# Altium PCB Power_Supply.PcbDoc (part 1 of 2)
Units mm, origin at the board's own origin, x right, y up, seen from the top; angles counter-clockwise.
Board outline 100.2 x 49.53 mm, 2 copper layers (Top Layer, Bottom Layer); 41 components, 25 nets, 105 pads, 0 vias.
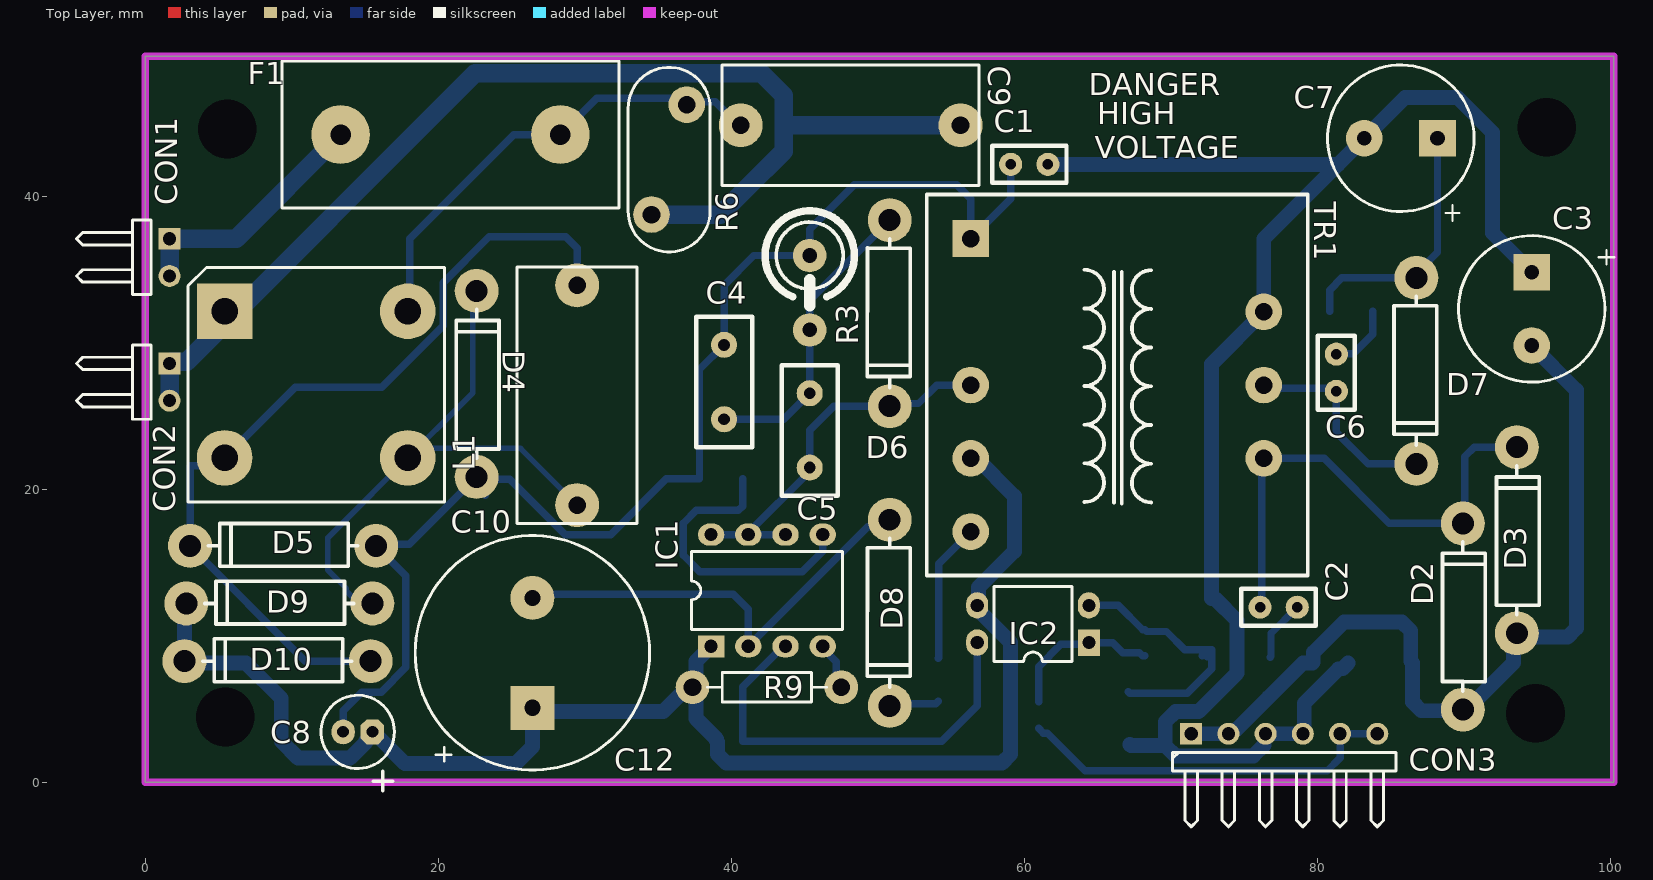
[diagram p0: Top Layer view]
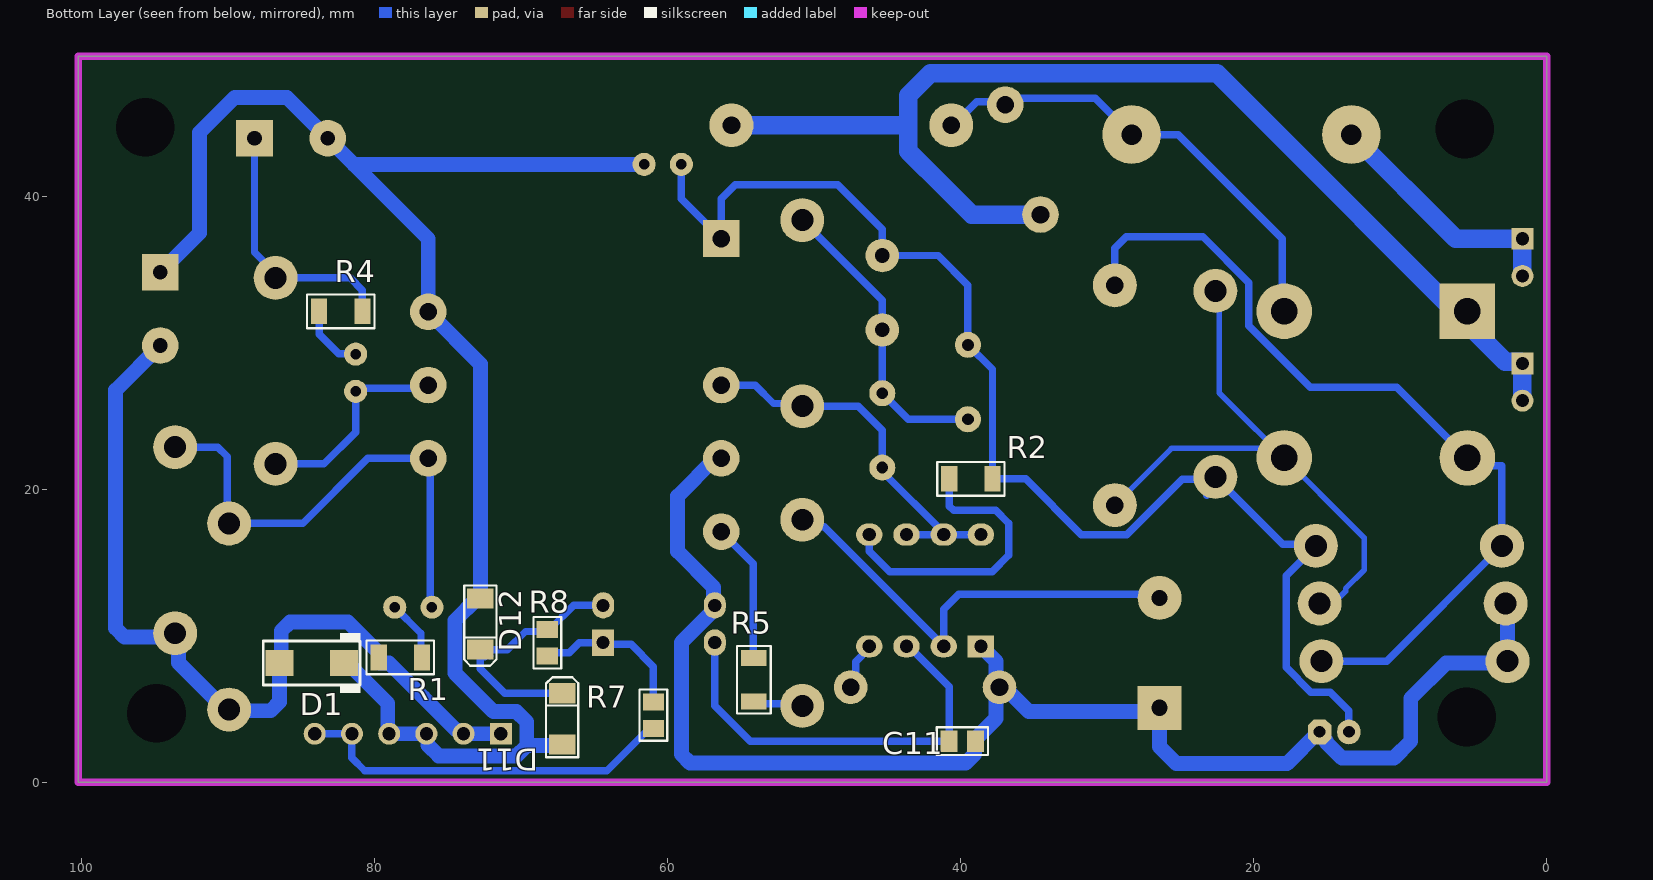
[diagram p1: Bottom Layer view, seen from below]
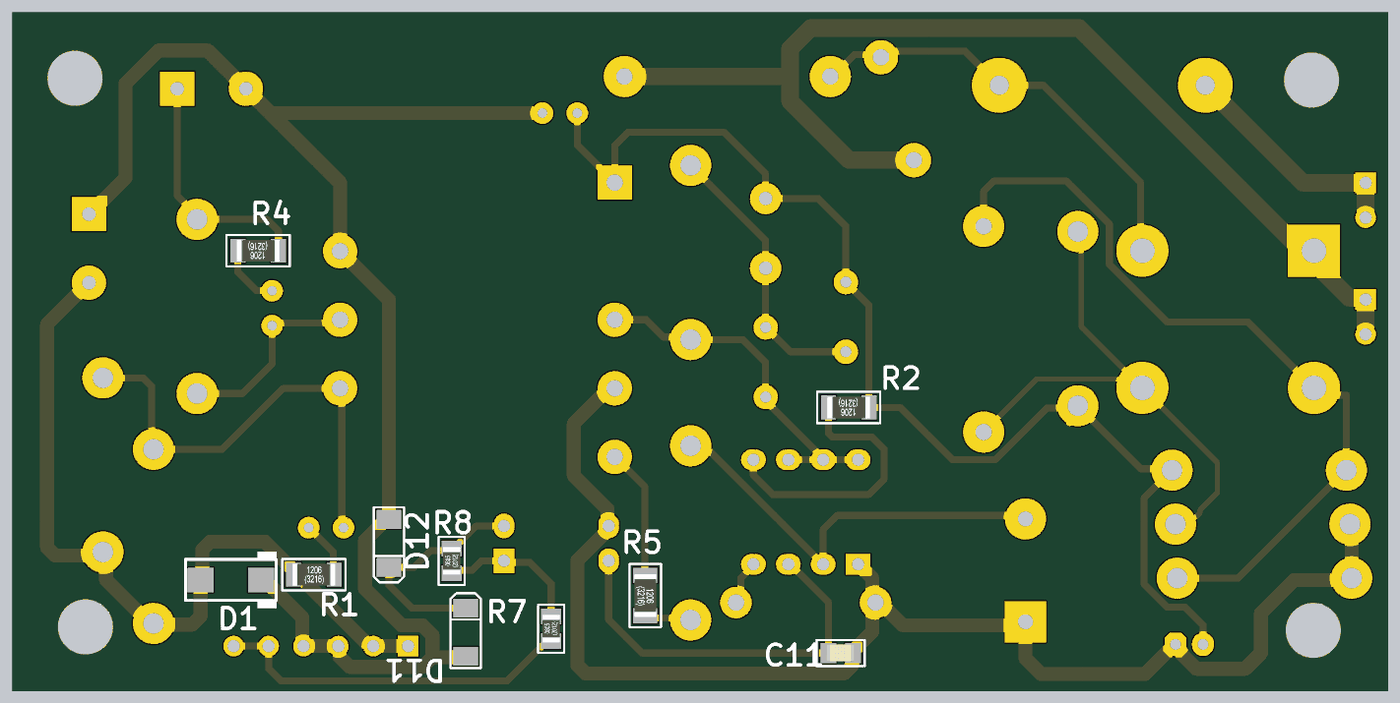
[diagram p2: 3D render of the assembled board from below, using the file's embedded part models]

## Layer stack, top to bottom
Top Solder: solder mask 0.0102, Solder Resist, Dk 3.5
Top Layer: signal copper 0.0356
Dielectric 1: dielectric 0.32, FR-4, Dk 4.8
Bottom Layer: signal copper 0.0356
Bottom Solder: solder mask 0.0102, Solder Resist, Dk 3.5

## Board outline
0,0 100.203,0 100.203,49.53 0,49.53

## Design rules (kind name [scope] priority, off if disabled: settings)
Clearance [All] p1: gap=0.254 ignorepadtopadclearanceinfootprint=FALSE
Height [All] p1: minheight=0 maxheight=30 prefheight=20
PolygonConnect [All] p1: connectstyle=Relief reliefconductorwidth=0.254 reliefentries=4 polygonreliefangle="90 Angle" airgapwidth=0.254
RoutingVias [All] p1: holewidth=0.711 width=1.27 viastyle="Through Hole" minholewidth=0.711 minwidth=1.27 maxholewidth=0.711 maxwidth=1.27
ShortCircuit [All] p1: allowed=TRUE
SolderMaskExpansion [All] p1: expansion=0.102 istentingtop=FALSE
Width [All] p1: maxlimit=2.54 minlimit=0.254 preferedwidth=0.254
28 further rules are at their usual default settings.

## Components (designator, comment, footprint, x,y, rotation, side; value= is the part's Value field where it differs from the comment)
C1 "22nF" 2.54X5.5MM 61.595,42.164 r180 top value=220pF
C2 "220pF" 2.54X5.5MM 78.613,11.938 r180 top
C3 "470uF" RAD5X10X16 94.615,34.798 r270 top
C4 "4.7nF" 5.08X12.5MM 39.497,29.845 r270 top
C5 "100pF" 5.08X12.5MM 45.339,26.543 r270 top
C6 "220pF" 2.54X5.5MM 81.28,29.21 r270 top
C7 "470uF" RAD5X10X16 88.185,43.942 r180 top
C8 "22uF" RAD2X5X11 15.494,3.429 r180 top
C9 "150nF" MKPX2-15MM 40.631,44.831 r0 top
C10 "150nF" MKPX2-15MM 29.464,18.909 r90 top
C11 "100nF" CAPC2012X14N(0805) 39.878,2.794 r180 bottom
C12 "22uF" RAD7.5X16X26 26.416,5.073 r90 top
CON1 "Header-1x2" HEADER-1X2H 1.651,37.084 r270 top value=1x2
CON2 "Header-1x2" HEADER-1X2H 1.651,28.575 r270 top value=1x2
CON3 "HEADER-1X6" HEADER-1X6H 71.374,3.302 r0 top value=1x6
D1 "SMAJ24A-TR" DO-214AC-NEVA 84.287,8.128 r0 bottom
D2 "1N4937" DO-41 89.916,4.953 r90 top
D3 "1N4937" DO-41 93.599,10.16 r90 top
D4 "1N4007" DO-41 22.606,20.828 r90 top
D5 "1N4007" DO-41 15.748,16.129 r180 top
D6 "1N4007" DO-41 50.8,38.354 r270 top
D7 "1N4937" DO-41 86.741,34.417 r270 top
D8 "1N4937" DO-41 50.8,17.907 r270 top
D9 "1N4007" DO-41 15.494,12.192 r180 top
D10 "1N4007" DO-41 15.367,8.255 r180 top
D11 "BZX84-B22" SOD-80C 67.183,4.318 r270 bottom value=BZV55-B22
D12 "BZV55-B22V" SOD-80C 72.771,10.795 r90 bottom value=BZV55-B22
F1 "FUSE" "707001-FUSE HOLDER" 28.321,44.196 r180 top value=-
IC1 "IC-SMPS" DIP-8 38.608,9.271 r0 top value=-
IC2 "PC817B" DIP-4 64.389,9.525 r90 top value=-
L1 "LINE FILTER" "Line Filter 2x33mH" 5.407,32.131 r270 top value=-
R1 "100R" RESC3216X84N(1206) 78.232,8.509 r180 bottom
R2 "56K" RESC3216X84N(1206) 39.292,20.701 r0 bottom value=100K
R3 "100K" "VERTICAL RES-AX0.7" 45.339,35.941 r270 top
R4 "100R" RESC3216X84N(1206) 82.296,32.131 r0 bottom
R5 "100R" RESC3216X84N(1206) 54.102,6.985 r270 bottom
R6 "320VAC" VARISTOR-320V-10mm 35.744,42.485 r270 top value=680
R7 "680R" RESC2013X70N(0805) 60.96,4.572 r90 bottom value=1K
R8 "1K" RESC2013X70N(0805) 68.199,9.514 r90 bottom value=6.8K
R9 "6.8K" AXIAL0.4 47.498,6.477 r180 top
TR1 "Transformer" TRAFO-24X25X18MM 56.327,37.098 r0 top

## Footprints (in the part's own frame and the unit in brackets; to place one, negate y for a bottom-side part, rotate by r counter-clockwise, add the part's x,y. Pads: shape width x height; smd on the part's side, far side on the other; paste and mask are expansions set on the pad)
2.54X5.5MM [mil] "Body 5X2.54mm, Pitch:2.54mm"
  round 62 hole 28: 1(0,0) 2(100,0)
  silkscreen extent -50,-50 150,50
5.08X12.5MM [mil] "body:8.9x3.81mm (W x L) Pitch:5.08mm"
  round 70 hole 32: 1(0,0) 2(200,0)
  silkscreen extent -75,-75 275,75
"707001-FUSE HOLDER" [mm] "Body:22.8X8.1 mm (W x L)"
  round 4 hole 1.4: 1(0,0) 2(15,0)
  silkscreen extent -4,-5 19,5
AXIAL0.4 [mm] "body:3.5 X 10 mm( D  x L ) Pitch:10.16 mm (400mil)"
  round 2.3 hole 1.2: 1(0,0) 2(10.16,0)
  silkscreen extent 1.02,-1.02 9.14,1.02
CAPC2012X14N(0805) [mm] "Chip Capacitor, 2-Leads, Body 2,00x1,25mm, IPC Medium Density"
  rect 1.15x1.45 smd: 1(-0.9,0) 2(0.9,0)
  silkscreen extent -1.75,-0.95 1.75,0.95, body extent -1.03,-0.62 0.97,0.63, height 1.38
DIP-4 [mm] "Body: 7.6 X 6.5 mm (L x W)  Pitch:2.54 mm"
  rect 1.8x1.5 hole 0.9: 1(0,0)
  oval 1.8x1.5 hole 0.9: 2(2.54,0) 3(2.54,7.62) 4(0,7.62)
  silkscreen extent -1.28,1.16 3.82,6.46
DIP-8 [mm] "8-Pin DIP Body: 5.3 X 10.3 mm (W x L)  pitch:2.54mm"
  rect 1.8x1.5 hole 0.9: 1(0,0)
  oval 1.8x1.5 hole 0.9: 2(2.54,0) 3(5.08,0) 4(7.62,0) 5(7.62,7.62) 6(5.08,7.62) 7(2.54,7.62) 8(0,7.62)
  silkscreen extent -1.34,1.16 8.96,6.46
DO-41 [mm] "body: 13 X3 mm (W x L) Pitch:12.7mm"
  round 3 hole 1.5: 1(0,0) 2(12.7,0)
  silkscreen extent 1.27,-1.53 11.43,1.4
DO-214AC-NEVA [mm] "Body;5.84X 3.04mm (WxL),Pitch 4.4mm"
  rect 1.9x1.8 smd: 1(2.2,0) 2(-2.2,0)
  silkscreen extent -3.35,-2.06 3.3,2.06
HEADER-1X2H [mm] "Connector; Header; 2 Position; Right Angle"
  rect 1.5x1.5 hole 0.9: 1(0,0)
  round 1.5 hole 0.9: 2(2.54,0)
  silkscreen extent -1.27,-6.35 3.81,-1.27
HEADER-1X6H [mm] "Connector; Header; 6 Position; Right Angle"
  rect 1.5x1.5 hole 0.9: 1(0,0)
  round 1.5 hole 0.9: 2(2.54,0) 3(5.08,0) 4(7.62,0) 5(10.16,0) 6(12.7,0)
  silkscreen extent -1.27,-6.35 13.97,-1.27
"Line Filter 2x33mH" [mm] "body:17.5x16x21 mm (W X L X H)"
  rect 3.8x3.8 hole 1.8: 1(0,0)
  round 3.8 hole 1.8: 2(10,0) 3(10,12.5) 4(0,12.5)
  silkscreen extent -3,-2.5 13,15
MKPX2-15MM [mm] "Metallized Polypropylene Film Capacitor;Body 15x12mm (P X H)"
  round 3 hole 1.2: 1(0,0) 2(15,0)
  silkscreen extent -1.27,-4.1 16.26,4.1
RAD2X5X11 [mm] "Capacitor, Electrolytic, Radial; Body 5 x 11 mm (Dia.xL typ); Pin Spacing 2 mm (typ)"
  oct 1.6x1.7 hole 0.8: 1(0,0)
  oval 1.6x1.7 hole 0.8: 2(2,0)
  silkscreen extent -1.5,-2.5 3.5,4.01
RAD5X10X16 [mm] "Capacitor, Electrolytic, Radial; Body 10 x 16 mm (Dia.xL typ); Pin Spacing 5 mm (typ)"
  rect 2.5x2.5 hole 1: 1(0,0)
  round 2.5 hole 1: 2(5,0)
  silkscreen extent -2.5,-5 7.5,5.64
RAD7.5X16X26 [mm] "Capacitor, Electrolytic, Radial; Body 16 x 26 mm (Dia.xL typ); Pin Spacing 7.5 mm (typ)"
  rect 3x3 hole 1.1: 1(0,0)
  round 3 hole 1.1: 2(7.5,0)
  silkscreen extent -4.25,-8 11.75,8
RESC2013X70N(0805) [mm] "Chip Resistor, 2-Leads, Body 2,00x1,25mm, IPC Medium Density"
  rect 1.15x1.45 smd: 1(-0.9,0) 2(0.9,0)
  silkscreen extent -1.75,-0.95 1.75,0.95, body extent -1,-0.62 1,0.63, height 0.48
RESC3216X84N(1206) [mm] "Chip Resistor, 2-Leads, Body 3,20x1,60mm, IPC Medium Density"
  rect 1.1x1.75 smd: 1(-1.475,0) 2(1.475,0)
  silkscreen extent -2.3,-1.15 2.3,1.15, body extent -1.55,-0.8 1.55,0.8, height 0.67
SOD-80C [mm] "body:3.5 X 1.45 mm (L x W)  Pitch:3.5mm"
  rect 1.37x1.8 smd: 1(-1.75,0) 2(1.75,0)
  silkscreen extent -2.84,-1.1 2.62,1.1
TRAFO-24X25X18MM [mm] "Body:24/25/18 mm (W x L x H) Pitch:4mm-15.2mm"
  rect 2.5x2.5 hole 1.2: 1(0,0)
  round 2.5 hole 1.2: 3(0,-10) 4(0,-15) 5(0,-20) 7(20,-15) 8(20,-10) 9(20,-5)
  silkscreen extent -3,-23 23,3
VARISTOR-320V-10mm [mm] "body:15.5 X 5.4 mm (W x L)   Pitch:7.5mm"
  round 2.5 hole 1.2: 1(-3.75,1.2) 2(3.75,-1.2)
  silkscreen extent -6.3,-2.8 6.3,2.8
"VERTICAL RES-AX0.7" [mil] "Dia:6 mm  Pitch:5mm"
  round 90 hole 39: 1(0,0) 2(200,0)
  silkscreen extent -120,-120 135,120

## Part data
C1: library part "CAP CER DISC 220PF", "KEMET 220pF Multilayer Ceramic Capacitor (MLCC) 500 V dc 10% X7R dielectric C SMT max op. temp. +125C", Capacitance=220pF, Case Code (Metric)=2012, Case Code (Imperial)=0805, Dielectric=X7R, Dielectric Material=Ceramic, Manufacturer=KEMET, Max Operating Temperature=125°C, Min Operating Temperature=-55°C, Package Quantity=1, Supplier Part Number 1=80-C0805C221KCR, Tolerance=10%, Voltage=500V, Case/Package=0805, Category="Ceramic Capacitors", Component=2, ComponentLink1Description=https://datasheet.ciiva.com/14606/70096142-14606492.pdf?src-supplier=Allied+Electronics, ComponentLink1URL=https://datasheet.ciiva.com/14606/70096142-14606492.pdf?src-supplier=Allied+Electronics, Depth=1.2mm, Dissipation Factor=2.5%, Height=1.25mm, Length=2mm, Manufacturer Part Number="CAP CER DISC 220PF", Mount="Surface Mount,PCB", Number of Pins=2, Packaging="Tape and Reel", Pricing 1="1=0,37000, 10=0,21600, 100=0,15700, 500=0,13900, 1000=0,11800, 2500=0,09500 (USD)", RoHS=Yes, Stock 1=17842, Supplier 1=Mouser, Termination=SMD/SMT, Thickness=0.055inch, Voltage Rating=500V, Voltage Rating (DC)=500V, Width=0.049inch
C2 C6: library part "CAP CER DISC 220PF", "KEMET 220pF Multilayer Ceramic Capacitor (MLCC) 500 V dc 10% X7R dielectric C SMT max op. temp. +125C", Case Code (Metric)=2012, Case Code (Imperial)=0805, Dielectric=X7R, Dielectric Material=Ceramic, Manufacturer=KEMET, Max Operating Temperature=125°C, Min Operating Temperature=-55°C, Package Quantity=1, Supplier Part Number 1=80-C0805C221KCR, Tolerance=10%, Voltage=500V, Capacitance=220pF, Case/Package=0805, Category="Ceramic Capacitors", Component=2, ComponentLink1Description=https://datasheet.ciiva.com/14606/70096142-14606492.pdf?src-supplier=Allied+Electronics, ComponentLink1URL=https://datasheet.ciiva.com/14606/70096142-14606492.pdf?src-supplier=Allied+Electronics, Depth=1.2mm, Dissipation Factor=2.5%, Height=1.25mm, Length=2mm, Manufacturer Part Number="CAP CER DISC 220PF", Mount="Surface Mount,PCB", Number of Pins=2, Packaging="Tape and Reel", Pricing 1="1=0,37000, 10=0,21600, 100=0,15700, 500=0,13900, 1000=0,11800, 2500=0,09500 (USD)", RoHS=Yes, Stock 1=17842, Supplier 1=Mouser, Termination=SMD/SMT, Thickness=0.055inch, Voltage Rating=500V, Voltage Rating (DC)=500V, Width=0.049inch
C3 C7: library part "CAP EL 470UF", "ALUMINUM ELECTROLYTIC CAPACITOR 100UF, 63V, 20%, RADIAL, FULL REEL; Product Range:VR Series; Capacitance:100 F; Capacitance Tolerance: 20%; Voltage Rating:63V; Diameter:10mm; Capacitor Terminals:Radial Leaded; Packaging:Tape & Reel ;RoHS Compliant: Yes", Capacitance=100uF, Case/Package=Radial, Leakage Current=189uA, Manufacturer=Nichicon, Max Operating Temperature=85°C, Min Operating Temperature=-40°C, Package Quantity=500, Ripple Current=300mA, Supplier Part Number 1=UVR1J101MPD1TD, Tolerance=20%, Voltage=63V, Category="Aluminum Electrolytic Capacitors", Component=18, ComponentLink1Description=https://datasheet.ciiva.com/11685/e-vr-11685845.pdf?src-supplier=Avnet, ComponentLink1URL=https://datasheet.ciiva.com/11685/e-vr-11685845.pdf?src-supplier=Avnet, ComponentLink2Description=https://datasheet.ciiva.com/103/e-vr-103352.pdf?src-supplier=Digi-Key, ComponentLink2URL=https://datasheet.ciiva.com/103/e-vr-103352.pdf?src-supplier=Digi-Key, ComponentLink3Description=https://datasheet.ciiva.com/14603/70187464-14603353.pdf?src-supplier=Allied+Electronics, ComponentLink3URL=https://datasheet.ciiva.com/14603/70187464-14603353.pdf?src-supplier=Allied+Electronics, ComponentLink4Description=https://datasheet.ciiva.com/16392/e-vr-16392921.pdf?src-supplier=Future+Electronics, ComponentLink4URL=https://datasheet.ciiva.com/16392/e-vr-16392921.pdf?src-supplier=Future+Electronics, ComponentLink5Description=https://datasheet.ciiva.com/46381/1758668-46381770.pdf?src-supplier=Element14, ComponentLink5URL=https://datasheet.ciiva.com/46381/1758668-46381770.pdf?src-supplier=Element14, ComponentLink6Description=https://datasheet.ciiva.com/17354/e-vr-17354940.pdf?src-supplier=Avnet+Europe, ComponentLink6URL=https://datasheet.ciiva.com/17354/e-vr-17354940.pdf?src-supplier=Avnet+Europe, ComponentLink7Description=https://datasheet.ciiva.com/7907/e-vr-7907502.pdf?src-supplier=Element14, ComponentLink7URL=https://datasheet.ciiva.com/7907/e-vr-7907502.pdf?src-supplier=Element14, Diameter=10mm, Dissipation Factor=0.1%, Height=12.5mm, Height - Seated (Max)=0.492inch, Lead Diameter=0.6mm, Lead Pitch=5mm, Length=12.5mm, Life (Hours)=2000Hour, Manufacturer Part Number="CAP EL 470UF", Mount="Through Hole,PCB", Number of Pins=2, Packaging="Tape and Reel", Pricing 1="1=0,21830, 10=0,14660, 25=0,05930, 100=0,05410, 2000=0,07080, 6000=0,06440 (USD)", Radiation Hardening=No, REACH SVHC="No SVHC", RoHS=Yes, Stock 1=105, Supplier 1=Arrow, Termination=Radial, Voltage Rating=63V, Voltage Rating (DC)=63V
C4: library part "CAP CER DISC 4.7NF", "KEMET - C0805C472KARACAUTO - Keramikvielschichtkondensator, SMD, 4700 pF, 250 V, 0805 [Metrisch 2012], ± 10%, X7R", Case Code (Metric)=2012, Case Code (Imperial)=0805, Dielectric=X7R, Manufacturer=KEMET, Max Operating Temperature=125°C, Min Operating Temperature=-55°C, Package Quantity=4000, Supplier Part Number 1=80-C0805C472KARAUTO, Tolerance=10%, Voltage Rating=250V, Capacitance=4.7nF, Case/Package=0805, Category=Capacitors, Component=4, ComponentLink1Description=http://www.mouser.com/ds/2/212/KEM_C1023_X7R_AUTO_SMD-1093309.pdf?src-supplier=Mouser, ComponentLink1URL=http://www.mouser.com/ds/2/212/KEM_C1023_X7R_AUTO_SMD-1093309.pdf?src-supplier=Mouser, ComponentLink2Description=http://www.farnell.com/datasheets/2747493.pdf?src-supplier=Farnell, ComponentLink2URL=http://www.farnell.com/datasheets/2747493.pdf?src-supplier=Farnell, ComponentLink3Description=http://www.farnell.com/datasheets/2747493.pdf?src-supplier=Element14, ComponentLink3URL=http://www.farnell.com/datasheets/2747493.pdf?src-supplier=Element14, ComponentLink4Description=https://api.kemet.com/component-edge/download/specsheet/C0805C472KARACAUTO.pdf?src-supplier=Digi-Key, ComponentLink4URL=https://api.kemet.com/component-edge/download/specsheet/C0805C472KARACAUTO.pdf?src-supplier=Digi-Key, ComponentLink5Description=http://www.farnell.com/datasheets/2747493.pdf?src-supplier=Newark, ComponentLink5URL=http://www.farnell.com/datasheets/2747493.pdf?src-supplier=Newark, Height=1.25mm, Length=2mm, Manufacturer Part Number="CAP CER DISC 4.7NF", Packaging="Tape and Reel", Pricing 1="1=0,28000, 10=0,11500, 100=0,09700, 500=0,06700, 1000=0,05900, 4000=0,04600 (USD)", RoHS=Yes, Stock 1=3353, Supplier 1=Mouser, Termination=SMD/SMT, Voltage Rating (DC)=250V, Width=1.2mm
C5: library part "CAP CER DISC 100PF", "CAP CER 100PF 1KV X7R 0805", Case Code (Metric)=2012, Case Code (Imperial)=0805, Dielectric=X7R, Dielectric Material=Ceramic, Manufacturer=KEMET, Max Operating Temperature=125°C, Min Operating Temperature=-55°C, Package Quantity=1, Supplier Part Number 1=80-C0805C101KDRACTU, Tolerance=10%, Voltage Rating=1kV, Voltage Rating (DC)=1.5kV, Capacitance=100pF, Case/Package=0805, Category="Ceramic Capacitors", Component=5, ComponentLink1Description=http://www.farnell.com/datasheets/2315402.pdf?src-supplier=Farnell, ComponentLink1URL=http://www.farnell.com/datasheets/2315402.pdf?src-supplier=Farnell, ComponentLink2Description=http://components.arrow.com/part/dataview/0323_00070989?src-supplier=Arrow+Europe, ComponentLink2URL=http://components.arrow.com/part/dataview/0323_00070989?src-supplier=Arrow+Europe, ComponentLink3Description=http://www.mouser.com/ds/2/212/KEM_C1010_X7R_HV_SMD-1102742.pdf?src-supplier=Mouser, ComponentLink3URL=http://www.mouser.com/ds/2/212/KEM_C1010_X7R_HV_SMD-1102742.pdf?src-supplier=Mouser, ComponentLink4Description=https://search.kemet.com/component-edge/download/datasheet/C0805C101KDRACTU.pdf?src-supplier=Digi-Key, ComponentLink4URL=https://search.kemet.com/component-edge/download/datasheet/C0805C101KDRACTU.pdf?src-supplier=Digi-Key, ComponentLink5Description=https://api.kemet.com/component-edge/download/datasheet/C0805C101KDRACTU.pdf?src-supplier=Digi-Key, ComponentLink5URL=https://api.kemet.com/component-edge/download/datasheet/C0805C101KDRACTU.pdf?src-supplier=Digi-Key, Depth=1.25mm, Height=1.25mm, Length=2mm, Manufacturer Part Number="CAP CER DISC 100PF", Mount="Surface Mount", Packaging="Tape and Reel", Pricing 1="1=0,52000, 10=0,31300, 100=0,18900, 500=0,16100, 1000=0,13900, 2500=0,10000 (USD)", Radiation Hardening=No, RoHS=Yes, Stock 1=2330, Supplier 1=Mouser, Termination=SMD/SMT, Thickness=0.055inch, Width=0.049inch
C8: library part "CAP EL 22UF 35VDC", "CAP, ALU ELEC, 22UF, 35V, SMD", Case/Package=Radial, Dielectric Material=Aluminium, Leakage Current=3uA, Manufacturer=Panasonic, Max Operating Temperature=85°C, Min Operating Temperature=-40°C, Package Quantity=1, Ripple Current=60mA, Supplier Part Number 1=667-EEE-1VA220SP, Tolerance=20%, Voltage=35V, Capacitance=22uF, Category="Aluminum Electrolytic Capacitors", Component=9, ComponentLink1Description=https://datasheet.ciiva.com/11778/0900766b8078636e-11778914.pdf?src-supplier=RSComponents, ComponentLink1URL=https://datasheet.ciiva.com/11778/0900766b8078636e-11778914.pdf?src-supplier=RSComponents, ComponentLink2Description=https://datasheet.ciiva.com/15166/getdatasheetpartid-135375-15166031.pdf?src-supplier=Verical, ComponentLink2URL=https://datasheet.ciiva.com/15166/getdatasheetpartid-135375-15166031.pdf?src-supplier=Verical, ComponentLink3Description=https://datasheet.ciiva.com/6085/aba0000ce2-6085109.pdf?src-supplier=Farnell, ComponentLink3URL=https://datasheet.ciiva.com/6085/aba0000ce2-6085109.pdf?src-supplier=Farnell, ComponentLink4Description=https://datasheet.ciiva.com/46376/aba0000ce2-46376415.pdf?src-supplier=Element14, ComponentLink4URL=https://datasheet.ciiva.com/46376/aba0000ce2-46376415.pdf?src-supplier=Element14, Contact Plating=Tin, Diameter=6.3mm, Height=5.4mm, Height - Seated (Max)=0.213inch, Lead Free="Lead Free", Lead Length=2.6mm, Lead Pitch=1.8mm, Length=5.5mm, Life (Hours)=2000Hour, Manufacturer Part Number="CAP EL 22UF 35VDC", Mount="Surface Mount,PCB", Number of Pins=2, Packaging="Tape and Reel", Pricing 1="1=0,33300, 10=0,21600, 100=0,15200, 500=0,14000, 1=0,37000, 10=0,24000, 100=0,16900, 500=0,15500, 1000=0,15500, 2000=0,15500 (EUR)", Radiation Hardening=No, REACH SVHC="No SVHC", Ripple Current (AC)=60mA, RoHS=Yes, Stock 1=12077, Supplier 1=Mouser, Termination=SMD/SMT, Voltage Rating=35V, Voltage Rating (DC)=35V, Width=6.6mm
C9 C10: library part "CAP MKP 150NF 275VAC", "Cap Film 0.15uF 275VAC PP 20% (17.5 X 6 X 13mm) Radial 15mm 110C Bulk", Case/Package=Radial, Dielectric=PP, Manufacturer=Panasonic, Max Operating Temperature=110°C, Min Operating Temperature=-40°C, Package Quantity=100, Supplier Part Number 1=667-ECQ-UAAF154M, Tolerance=20%, Voltage=275V, Capacitance=150nF, Category="Film Capacitors", Component=7, ComponentLink1Description=https://datasheet.ciiva.com/11792/0900766b80fb6a81-11792240.pdf?src-supplier=RSComponents, ComponentLink1URL=https://datasheet.ciiva.com/11792/0900766b80fb6a81-11792240.pdf?src-supplier=RSComponents, ComponentLink2Description=https://datasheet.ciiva.com/46399/1382881-46399669.pdf?src-supplier=Element14, ComponentLink2URL=https://datasheet.ciiva.com/46399/1382881-46399669.pdf?src-supplier=Element14, ComponentLink3Description=https://datasheet.ciiva.com/17632/abd0000ce53-17632333.pdf?src-supplier=Avnet+Europe, ComponentLink3URL=https://datasheet.ciiva.com/17632/abd0000ce53-17632333.pdf?src-supplier=Avnet+Europe, ComponentLink4Description=https://datasheet.ciiva.com/30066/47abd0000ce53-30066232.pdf?src-supplier=Onlinecomponents.com, ComponentLink4URL=https://datasheet.ciiva.com/30066/47abd0000ce53-30066232.pdf?src-supplier=Onlinecomponents.com, Contact Plating=Tin, Depth=6mm, Dielectric Material=PP, Height=13mm, Height - Seated (Max)=0.531inch, Lead Diameter=0.6mm, Lead Pitch=15mm, Lead/Base Style=Straight, Length=17.5mm, Manufacturer Part Number="CAP MKP 150NF 275VAC", Mount="Through Hole", Number of Pins=2, Packaging=Bulk, Pricing 1="1=0,48000, 10=0,34000, 100=0,22400, 500=0,16600, 1000=0,14100, 2000=0,12400 (USD)", Radiation Hardening=No, REACH SVHC="No SVHC", RoHS=Yes, Stock 1=1407, Supplier 1=Mouser, Termination=Radial, Voltage Rating (AC)=275V, Width=0.236inch
C11: library part "CAP CER 100NF", "TDK - CGA3E2X7R1H104K080AA. - CERAMIC CAPACITOR, 0.1UF, 50V, X7R, 0603, FULL REEL", Case Code (Metric)=1608, Case Code (Imperial)=0603, Dielectric=X7R, Manufacturer=TDK, Max Operating Temperature=125°C, Min Operating Temperature=-55°C, Package Quantity=1, Ratings=AEC-Q200, Supplier Part Number 1=810-CGA3E2X7R1H104K, Tolerance=10%, Voltage=50V, Capacitance=100nF, Case/Package=0603, Category="Ceramic Capacitors", Component=8, ComponentLink1Description=https://datasheet.ciiva.com/24216/cga3e2x7r1h104k080aa-266291-24216208.pdf?src-supplier=Mouser, ComponentLink1URL=https://datasheet.ciiva.com/24216/cga3e2x7r1h104k080aa-266291-24216208.pdf?src-supplier=Mouser, ComponentLink2Description=https://datasheet.ciiva.com/15192/getdatasheetpartid-715867-15192412.pdf?src-supplier=Verical, ComponentLink2URL=https://datasheet.ciiva.com/15192/getdatasheetpartid-715867-15192412.pdf?src-supplier=Verical, ComponentLink3Description=https://datasheet.ciiva.com/16500/mlccspec-automotive-general-midvoltage-en-16500693.pdf?src-supplier=Future+Electronics, ComponentLink3URL=https://datasheet.ciiva.com/16500/mlccspec-automotive-general-midvoltage-en-16500693.pdf?src-supplier=Future+Electronics, ComponentLink4Description=https://datasheet.ciiva.com/22725/1735392-22725642.pdf?src-supplier=Element14, ComponentLink4URL=https://datasheet.ciiva.com/22725/1735392-22725642.pdf?src-supplier=Element14, ComponentLink5Description=https://datasheet.ciiva.com/23803/1936565-23803084.pdf?src-supplier=Newark, ComponentLink5URL=https://datasheet.ciiva.com/23803/1936565-23803084.pdf?src-supplier=Newark, ComponentLink6Description=https://datasheet.ciiva.com/46385/1735392-46385708.pdf?src-supplier=Element14, ComponentLink6URL=https://datasheet.ciiva.com/46385/1735392-46385708.pdf?src-supplier=Element14, Composition=Ceramic, Depth=0.8mm, Height=0.8mm, Lead Free="Lead Free", Length=1.6mm, Manufacturer Part Number="CAP CER 100NF", Mount="Surface Mount", Packaging="Tape and Reel", Pricing 1="1=0,11000, 10=0,07900, 100=0,03500, 500=0,02500, 1000=0,01900, 4000=0,01300 (USD)", Radiation Hardening=No, REACH SVHC="No SVHC", RoHS=Yes, Stock 1=5553529, Supplier 1=Mouser, Termination=SMD/SMT, Thickness=0.035inch, Voltage Rating=50V, Voltage Rating (DC)=50V, Weight=7.1E-05oz, Width=0.8mm
C12: library part "CAP EL 22UF 450VDC", "Aluminum Electrolytic Capacitors - Leaded 22uF 450VDC -10% to 30%", Case/Package=Axial, Dielectric Material=Aluminium, ESR (Equivalent Series Resistance)=2.4R, Leakage Current=63.4uA, Manufacturer=KEMET, Max Operating Temperature=125°C, Min Operating Temperature=-40°C, Package Quantity=150, Ripple Current=240mA, Supplier Part Number 1=80-PEG124YH2220QL1, Tolerance=30%, Voltage=450V, Capacitance=22uF, Category="Aluminum Electrolytic Capacitors", Component=6, ComponentLink1Description=https://www.distrelec.biz/Web/Downloads/at/_e/xwPEG124xxx_dat_e.pdf?mime=application%2Fpdf&src-supplier=Distrelec, ComponentLink1URL=https://www.distrelec.biz/Web/Downloads/at/_e/xwPEG124xxx_dat_e.pdf?mime=application%2Fpdf&src-supplier=Distrelec, ComponentLink2Description=http://components.arrow.com/part/dataview/0323_01891001?src-supplier=Arrow+Europe, ComponentLink2URL=http://components.arrow.com/part/dataview/0323_01891001?src-supplier=Arrow+Europe, ComponentLink3Description=http://www.alliedelec.com/m/d/cbb45dc6290b6e87b76194cff6cccb64.pdf?src-supplier=Allied+Electronics, ComponentLink3URL=http://www.alliedelec.com/m/d/cbb45dc6290b6e87b76194cff6cccb64.pdf?src-supplier=Allied+Electronics, ComponentLink4Description=http://www.mouser.com/ds/2/212/KEM_A4011_PEG124-1104316.pdf?src-supplier=Mouser, ComponentLink4URL=http://www.mouser.com/ds/2/212/KEM_A4011_PEG124-1104316.pdf?src-supplier=Mouser, ComponentLink5Description=http://uk.rs-online.com/webdocs/00ab/0900766b800abff0.pdf?src-supplier=RSComponents, ComponentLink5URL=http://uk.rs-online.com/webdocs/00ab/0900766b800abff0.pdf?src-supplier=RSComponents, ComponentLink6Description=http://capacitoredge.kemet.com/capedge2/DataSheet?pn=A142ML220Q450A&src-supplier=Avnet, ComponentLink6URL=http://capacitoredge.kemet.com/capedge2/DataSheet?pn=A142ML220Q450A&src-supplier=Avnet, ComponentLink7Description=http://capacitoredge.kemet.com/capedge2/DataSheet?pn=A142ML220Q450A&src-supplier=Avnet+Europe, ComponentLink7URL=http://capacitoredge.kemet.com/capedge2/DataSheet?pn=A142ML220Q450A&src-supplier=Avnet+Europe, Diameter=20mm, Lead Diameter=0.8mm, Lead Length=42mm, Length=29mm, Manufacturer Part Number="CAP EL 22UF 450VDC", Mount="Through Hole", Packaging=Bulk, Pricing 1="1=5,43000, 10=4,97000, 50=4,50000, 100=4,13000, 250=3,74000, 500=3,73000 (USD)", Radiation Hardening=No, RoHS=Yes, Stock 1=959, Supplier 1=Mouser, Termination=Axial, Voltage Rating=450V, Voltage Rating (DC)=450V
CON1 CON2: library part HEADER1X2, "Conn Unshrouded Header HDR 6 POS 2.54mm Solder ST Thru-Hole", Case Code (Imperial)=125°C, Color=Black, Current Rating1=07:06:00, Manufacturer=Samtec, Max Voltage Rating (AC)1=550V, Resistance=15.24mm, Supplier Part Number 1=200-TSW10607LS, Temperature Coefficient=2.54mm, Category="Headers and Wire Housings", Component=1, ComponentLink1Description=Gold, ComponentLink7Description="No SVHC", ComponentLink7URL=No, ComponentLink8Description=https://datasheet.ciiva.com/48561/htsw-th-48561118.pdf?src-supplier=Avnet, ComponentLink8URL="Lead Free", ComponentLink9Description=https://datasheet.ciiva.com/48560/htsw-th-48560639.pdf?src-supplier=Avnet, ComponentLink9URL=https://datasheet.ciiva.com/48561/htsw-th-48561118.pdf?src-supplier=Avnet, Composition=https://datasheet.ciiva.com/22677/82167-22677747.pdf?src-supplier=Element14, Connector Type="Male Pin", Contact Mating Length=0.23inch, Depth=Solder, Features=https://datasheet.ciiva.com/25618/0900766b81154476-25618441.pdf?src-supplier=RSComponents, Gender=Male, Height=550V, Housing Material=Polyester, Lead Length=Bronze, Length=Bulk, Manufacturer Part Number=HEADER1X2, Max Current Rating=07:06:00, Max Power Dissipation=https://datasheet.ciiva.com/23732/320951-23732070.pdf?src-supplier=Newark, Number of Contacts=6, Number of Positions=6, Number of Rows=1, Number of Terminations=https://datasheet.ciiva.com/23732/320951-23732070.pdf?src-supplier=Newark, Orientation=Vertical, Packaging=https://datasheet.ciiva.com/22677/82167-22677747.pdf?src-supplier=Element14, Pitch=2.54mm, Power Rating=https://datasheet.ciiva.com/25618/0900766b81154476-25618441.pdf?src-supplier=RSComponents, Pricing 1="1=0,56000, 10=0,41900, 100=0,36700, 500=0,35000, 1000=0,28800, 2500=0,25300 (USD)", RoHS=Yes, Stock 1=2038, Supplier 1=Mouser, Termination=https://datasheet.ciiva.com/16723/htsw-th-16723150.pdf?src-supplier=Avnet+Europe, Thickness=Black, Voltage Rating=https://datasheet.ciiva.com/16723/htsw-th-16723150.pdf?src-supplier=Avnet+Europe, Weight=-55°C, Width=1, Working Voltage=https://datasheet.ciiva.com/48560/htsw-th-48560639.pdf?src-supplier=Avnet
CON3: library part HEADER1X6, Manufacturer="Adam Equipment", Supplier Part Number 1=2057-ADT-AMP1251106S4BS165A1-ND, Component=2, Manufacturer Part Number=HEADER1X6, Pricing 1="1=0,48000, 10=0,45500, 100=0,34850, 500=0,30300, 1000=0,24998, 5000=0,21968, 10000=0,20453 (USD)", RoHS=No, Stock 1=844, Supplier 1=Digi-Key
D1: library part DIODE-SMAJ, "STMICROELECTRONICS - SMAJ24A-TR - DIODE, TVS, 24V, 400W, UNI, SMA, RL", Breakdown Voltage=26.7V, Case Code (Metric)=600pF, Case Code (Imperial)=150°C, Case/Package=SMA, Clamping Voltage1=50V, Manufacturer=STMicroelectronics, Max Breakdown Voltage=28.1V, Max Power Dissipation1=3.3W, Max Reverse Leakage Current=200nA, Max Surge Current1=1mA, Min Operating Temperature=24V, Package Quantity=2, Peak Pulse Current=46A, Peak Pulse Power=400W, Power Line Protection=No, Resistance=4.6mm, Supplier Part Number 1=511-SMAJ24A-TR, Tolerance=2.03mm, Category="TVS Diodes", Component=1, ComponentLink3Description=200nA, ComponentLink4URL=Unidirectional, ComponentLink7Description="No SVHC", ComponentLink7URL=No, ComponentLink8Description=https://datasheet.ciiva.com/46394/1724007-46394359.pdf?src-supplier=Element14, ComponentLink8URL="Lead Free", ComponentLink9Description=https://datasheet.ciiva.com/337/cd00001333-337721.pdf?src-supplier=Digi-Key, ComponentLink9URL=https://datasheet.ciiva.com/46394/1724007-46394359.pdf?src-supplier=Element14, Composition=https://datasheet.ciiva.com/15143/getdatasheetpartid-82957-15143307.pdf?src-supplier=Verical, Depth=SMD/SMT, Diameter=Zener, Direction=Unidirectional, Element Configuration=Single, Energy=https://datasheet.ciiva.com/337/cd00001333-337722.pdf?src-supplier=Digi-Key, ESD Protection=Yes, Features=https://datasheet.ciiva.com/7965/1724007-7965493.pdf?src-supplier=Element14, Height - Seated (Max)=https://datasheet.ciiva.com/337/cd00001333-337722.pdf?src-supplier=Digi-Key, Length="Tape and Reel", Manufacturer Part Number=DIODE-SMAJ, Max Power Dissipation=https://datasheet.ciiva.com/337/cd00001333-337723.pdf?src-supplier=Digi-Key, Max Voltage Rating (AC)=https://datasheet.ciiva.com/41443/001183973-da-01-en-transil-400w-24v-smaj24a-tr-do-214ac-stm-41443285.pdf?src-supplier=Conrad, Min Breakdown Voltage=26.7V, Mount="Surface Mount", Number of Elements=1, Number of Terminations=https://datasheet.ciiva.com/337/cd00001333-337723.pdf?src-supplier=Digi-Key, Number of Unidirectional Channels=1, Operating Supply Voltage=24V, Packaging=https://datasheet.ciiva.com/15143/getdatasheetpartid-82957-15143307.pdf?src-supplier=Verical, Power Dissipation=400W, Power Rating=https://datasheet.ciiva.com/7965/1724007-7965493.pdf?src-supplier=Element14, Pricing 1="1=0,45000, 10=0,30800, 100=0,14400, 1000=0,10200, 5000=0,09800, 10000=0,08600 (USD)", REACH SVHC=2.95mm, Reverse Breakdown Voltage=26.7V, Reverse Standoff Voltage=24V, RoHS=Yes, Stock 1=15133, Supplier 1=Mouser, Termination=https://datasheet.ciiva.com/16204/cd00001333-16204855.pdf?src-supplier=Future+Electronics, Test Current=1mA, Varistor Voltage=https://datasheet.ciiva.com/41443/001183973-da-01-en-transil-400w-24v-smaj24a-tr-do-214ac-stm-41443285.pdf?src-supplier=Conrad, Voltage Rating=https://datasheet.ciiva.com/16204/cd00001333-16204855.pdf?src-supplier=Future+Electronics, Weight=-55°C, Width=1, Working Voltage=https://datasheet.ciiva.com/337/cd00001333-337721.pdf?src-supplier=Digi-Key
D2 D3 D7 D8: library part 1N4937G, "DIODE GEN PURP 600V 1A DO41", Average Rectified Current=01:00:00, Case Code (Imperial)=150°C, Current Rating=0.01lb, Forward Voltage=1.2V, Manufacturer="ON Semiconductor", Max Forward Surge Current (Ifsm)=30A, Max Repetitive Reverse Voltage (Vrrm)=600V, Package Quantity=2, Peak Reverse Current=5uA, Resistance=0.204inch, Supplier Part Number 1=863-1N4937G, Tolerance=0.25inch, Category="Rectifier Diodes", Component=2, ComponentLink1Description=Tin,Matte, ComponentLink4URL=Standard, ComponentLink5Description=2.7mm, ComponentLink7Description="No SVHC", ComponentLink7URL=No, ComponentLink8URL="Lead Free", Composition=https://datasheet.ciiva.com/916/1n4933-d-916277.pdf?src-supplier=Digi-Key, Current Rating1=01:00:00, Element Configuration=Single, Features=https://datasheet.ciiva.com/18435/70099679-18435384.pdf?src-supplier=Allied+Electronics, Forward Current=01:00:00, Halogen Free="Halogen Free", Length=Bulk, Manufacturer Part Number=1N4937G, Max Power Dissipation=https://datasheet.ciiva.com/7962/168219-7962936.pdf?src-supplier=Element14, Max Reverse Voltage (DC)=600V, Max Surge Current1=30A, Min Operating Temperature=600V, Number of Terminations=https://datasheet.ciiva.com/7962/168219-7962936.pdf?src-supplier=Element14, Output Current=01:00:00, Packaging=https://datasheet.ciiva.com/916/1n4933-d-916277.pdf?src-supplier=Digi-Key, Peak Non-Repetitive Surge Current=30A, Power Rating=https://datasheet.ciiva.com/18435/70099679-18435384.pdf?src-supplier=Allied+Electronics, Pricing 1="1=0,21600, 10=0,14900, 100=0,06000, 1000=0,04100, 2000=0,03300, 10000=0,02800, 25000=0,02700, 50000=0,02400, 100000=0,02300, 1=0,24000, 10=0,16500, 100=0,06700, 1000=0,04600, 2000=0,03700, 10000=0,03100 (EUR)", REACH SVHC=0.25inch, Recovery Time=300ns, Reverse Recovery Time=300ns, Reverse Voltage=600V, RoHS=Yes, Stock 1=11176, Supplier 1=Mouser, Weight=-65°C, Width=1000
D4 D5 D6 D9 D10: "Diode 1KV 1A 2-Pin DO-41 T/R", Average Rectified Current=01:00:00, Case Code (Metric)=15pF, Case Code (Imperial)=175°C, Current Rating=0.245g, Forward Voltage=1.1V, Manufacturer="ON Semiconductor / Fairchild", Max Forward Surge Current (Ifsm)=30A, Max Repetitive Reverse Voltage (Vrrm)=1kV, Package Quantity=2, Peak Reverse Current=5uA, Power Dissipation=3W, Resistance=5.2mm, Category="Integrated Circuits (ICs)", Component=3, ComponentLink1Description=Tin,Matte, ComponentLink4URL=Standard, ComponentLink5Description=2.72mm, ComponentLink7Description="No SVHC", ComponentLink7URL=No, ComponentLink8URL="Lead Free", Composition=https://datasheet.ciiva.com/1239/1n4005-1239313.pdf?src-supplier=Newark, Current Rating1=01:00:00, Element Configuration=Single, Features=https://datasheet.ciiva.com/910/1n4001-910361.pdf?src-supplier=Digi-Key, Forward Current=01:00:00, Length="Tape and Reel", Manufacturer Part Number=1N4007, Max Power Dissipation=https://datasheet.ciiva.com/927/1n4001-d-927427.pdf?src-supplier=Digi-Key, Max Reverse Voltage (DC)=1kV, Max Surge Current1=30A, Min Operating Temperature=1kV, Mount="Through Hole", Number of Terminations=https://datasheet.ciiva.com/927/1n4001-d-927427.pdf?src-supplier=Digi-Key, Output Current=01:00:00, Packaging=https://datasheet.ciiva.com/1239/1n4005-1239313.pdf?src-supplier=Newark, Peak Non-Repetitive Surge Current=30A, Power Rating=https://datasheet.ciiva.com/910/1n4001-910361.pdf?src-supplier=Digi-Key, Pricing 1="5000=0,08040, 10000=0,07890, 25000=0,07770, 50000=0,07650, 1=0,04550, 10=0,04510, 25=0,04460, 100=0,04420, 250=0,04080, 1=0,06170, 10=0,06120, 50=0,06050, 100=0,05990 (USD)", REACH SVHC=2.72mm, Reverse Voltage=1kV, RoHS=Yes, Stock 1=205000, Supplier 1=Arrow, Supplier Part Number 1=1N4007, Termination=https://datasheet.ciiva.com/910/1n4001-910362.pdf?src-supplier=Digi-Key, Tolerance=5.2mm, Voltage Rating=https://datasheet.ciiva.com/910/1n4001-910362.pdf?src-supplier=Digi-Key, Weight=-65°C, Width=1000
D11 D12: library part BZV55-B22,135, "DIODE ZENER 22V 500MW LLDS", Case Code (Imperial)=200°C, Manufacturer="NXP Semiconductors", Max Power Dissipation1=500mW, Max Reverse Leakage Current=50nA, Package Quantity=2, Supplier Part Number 1=771-BZV55-B22135, Test Current=5mA, Voltage Tolerance1=2%, Zener Voltage=22V, Category="Zener Diodes", Component=5, ComponentLink1Description=Tin,Matte, ComponentLink7URL=No, Composition=https://datasheet.ciiva.com/10644/bzv55-ser-10644374.pdf?src-supplier=Avnet, Contact Plating=2%, Element Configuration=Single, ESD Protection=No, Length="Tape and Reel", Manufacturer Part Number=BZV55-B22,135, Max Power Dissipation=https://datasheet.ciiva.com/898/bzv55-ser-898844.pdf?src-supplier=Digi-Key, Mount="Surface Mount", Number of Terminations=https://datasheet.ciiva.com/898/bzv55-ser-898844.pdf?src-supplier=Digi-Key, Packaging=https://datasheet.ciiva.com/10644/bzv55-ser-10644374.pdf?src-supplier=Avnet, Power Dissipation=500mW, Pricing 1="1=0,35000, 10=0,22700, 100=0,12300, 500=0,09700, 1000=0,07500, 2500=0,05900 (USD)", RoHS=Yes, Stock 1=1992, Supplier 1=Mouser, Weight=-65°C, Width=10000, Impedance=55R
F1: "Fuse Miniature Slow Blow Acting 1A 250V Holder Cartridge 5 X 20mm Glass Bulk", Current Rating=1A, DC Cold Resistance=61.3mR, Manufacturer=Littelfuse, Max Operating Temperature=125°C, Min Operating Temperature=-55°C, Package Quantity=1000, Power Dissipation=1.6W, Supplier Part Number 1=0218001.MXP, Voltage Rating=250V, Approvals=UL,CSA,VDE,CE,CCC,PSE,SEMKO,K-Mark, Body Material=Glass, Category=Fuses, Component=9, ComponentLink1Description=https://datasheet.ciiva.com/14120/218-series-eng-tds-14120439.pdf?src-supplier=Distrelec, ComponentLink1URL=https://datasheet.ciiva.com/14120/218-series-eng-tds-14120439.pdf?src-supplier=Distrelec, Contact Material=Brass, Contact Plating=Nickel, Diameter=5mm, Fuse Current=1A, Fuse Type="Cartridge, Glass", Housing Material=Glass, Lead Free="Lead Free", Length=20mm, Manufacturer Part Number=FUSE, Mount="Holder,Through Hole", Number of Pins=2, Packaging=Bulk, Pricing 1="1=0,04300, 1=0,78450, 10=0,62510, 100=0,53560, 250=0,50360, 500=0,42480, 1000=0,38460, 2000=0,35700, 1=0,89950, 10=0,68940, 100=0,57840, 250=0,53970, 500=0,44710, 1000=0,40120, 2000=0,37000, 1=0,85510, 10=0,66910, 100=0,56760, 250=0,53180, 500=0,44470, 10", Radiation Hardening=No, REACH SVHC=Unknown, Resistance=61.3mR, RoHS=Yes, Stock 1=43889, Supplier 1=Arrow, Termination=Clip, Voltage Rating (AC)=250V, Voltage Rating (DC)=250V, Working Voltage=250V
IC1: library part "IC SMPS FSL106HR", "IC,NC7WZ132K8X,", High Level Output Current=-32mA, Low Level Output Current=32mA, Manufacturer="ON Semiconductor / Fairchild", Max Operating Temperature=85°C, Max Supply Voltage=5.5V, Min Operating Temperature=-40°C, Min Supply Voltage=1.65V, Package Quantity=3000, Quiescent Current=1uA, Supplier Part Number 1=512-NC7WZ132K8X, Category="Logic Gates", Component=12, ComponentLink1Description=https://datasheet.ciiva.com/4818/nc7wz132-97672-4818801.pdf?src-supplier=Mouser, ComponentLink1URL=https://datasheet.ciiva.com/4818/nc7wz132-97672-4818801.pdf?src-supplier=Mouser, ComponentLink2Description=https://datasheet.ciiva.com/8278/nc7wz132-8278945.pdf?src-supplier=Avnet, ComponentLink2URL=https://datasheet.ciiva.com/8278/nc7wz132-8278945.pdf?src-supplier=Avnet, ComponentLink3Description=https://datasheet.ciiva.com/15090/getdatasheetpartid-110777-15090731.pdf?src-supplier=Verical, ComponentLink3URL=https://datasheet.ciiva.com/15090/getdatasheetpartid-110777-15090731.pdf?src-supplier=Verical, ComponentLink4Description=https://datasheet.ciiva.com/34301/1027871-34301887.pdf?src-supplier=Jameco, ComponentLink4URL=https://datasheet.ciiva.com/34301/1027871-34301887.pdf?src-supplier=Jameco, ComponentLink5Description=https://datasheet.ciiva.com/26865/nc7wz132k8x-26865071.pdf?src-supplier=IIIC, ComponentLink5URL=https://datasheet.ciiva.com/26865/nc7wz132k8x-26865071.pdf?src-supplier=IIIC, ComponentLink6Description=https://datasheet.ciiva.com/1868/nc7wz132-1868154.pdf?src-supplier=Digi-Key, ComponentLink6URL=https://datasheet.ciiva.com/1868/nc7wz132-1868154.pdf?src-supplier=Digi-Key, ComponentLink7Description=https://datasheet.ciiva.com/1868/nc7wz132-1868155.pdf?src-supplier=Digi-Key, ComponentLink7URL=https://datasheet.ciiva.com/1868/nc7wz132-1868155.pdf?src-supplier=Digi-Key, ComponentLink8Description=https://datasheet.ciiva.com/1868/nc7wz132-1868156.pdf?src-supplier=Digi-Key, ComponentLink8URL=https://datasheet.ciiva.com/1868/nc7wz132-1868156.pdf?src-supplier=Digi-Key, Contact Plating=Tin,Matte, Height=0.7mm, Lead Free="Lead Free", Length=2.3mm, Logic Function=NAND, Manufacturer Part Number="IC SMPS FSL106HR", Mount="Surface Mount", Number of Circuits=2, Number of Elements=2, Number of Gates=2, Number of Outputs=1, Number of Pins=8, Number of Terminals=8, Number of Inputs=2, Output Current=32mA, Packaging="Tape and Reel", Pricing 1="1=0,46000, 10=0,33900, 100=0,18900, 1000=0,14200, 3000=0,12200, 9000=0,11400 (USD)", Propagation Delay=13ns, Radiation Hardening=No, REACH SVHC="No SVHC", RoHS=Yes, Schmitt Trigger Input=No, Stock 1=3369, Supplier 1=Mouser, Turn-On Delay Time=6.3ns, Weight=0.03g, Width=2mm
IC2: library part "IC OPTO PC817B", "Optocoupler DC-IN 1-CH Transistor DC-OUT 4-Pin Mini-Flat T/R", Case/Package=SOIC, Collector Emitter Saturation Voltage=200mV, Collector Emitter Voltage (VCEO)=80V, Current Transfer Ratio=400%, Forward Current=50mA, Forward Voltage=1.4V, Manufacturer="Broadcom Avago", Max Operating Temperature=100°C, Max Power Dissipation=170mW, Min Operating Temperature=-55°C, Package Quantity=1, Reverse Breakdown Voltage=6V, Supplier Part Number 1=630-HCPL-181-00CE, Isolation Voltage=3.75kV, Approvals=UL,CSA,VDE, Category=Optocouplers, Component=8, ComponentLink1Description=https://datasheet.ciiva.com/15118/getdatasheetpartid-142379-15118792.pdf?src-supplier=Verical, ComponentLink1URL=https://datasheet.ciiva.com/15118/getdatasheetpartid-142379-15118792.pdf?src-supplier=Verical, ComponentLink2Description=https://datasheet.ciiva.com/16441/hcpl-181-00ce-16441017.pdf?src-supplier=Future+Electronics, ComponentLink2URL=https://datasheet.ciiva.com/16441/hcpl-181-00ce-16441017.pdf?src-supplier=Future+Electronics, ComponentLink3Description=https://datasheet.ciiva.com/29301/140250-da-01-en-fototransistor-optokoppler-hcpl-181-00ce-29301534.pdf?src-supplier=Conrad, ComponentLink3URL=https://datasheet.ciiva.com/29301/140250-da-01-en-fototransistor-optokoppler-hcpl-181-00ce-29301534.pdf?src-supplier=Conrad, ComponentLink4Description=https://datasheet.ciiva.com/46433/317140-46433653.pdf?src-supplier=Element14, ComponentLink4URL=https://datasheet.ciiva.com/46433/317140-46433653.pdf?src-supplier=Element14, ComponentLink5Description=https://datasheet.ciiva.com/8065/317140-8065628.pdf?src-supplier=Element14, ComponentLink5URL=https://datasheet.ciiva.com/8065/317140-8065628.pdf?src-supplier=Element14, ComponentLink6Description=https://datasheet.ciiva.com/48429/hcpl-181-eng-tds-48429868.pdf?src-supplier=Distrelec, ComponentLink6URL=https://datasheet.ciiva.com/48429/hcpl-181-eng-tds-48429868.pdf?src-supplier=Distrelec, ComponentLink7Description=https://datasheet.ciiva.com/8065/317140-8065629.pdf?src-supplier=Element14, ComponentLink7URL=https://datasheet.ciiva.com/8065/317140-8065629.pdf?src-supplier=Element14, Fall Time=18000ns, Manufacturer Part Number="IC OPTO PC817B", Max Collector Current=50mA, Max Output Voltage=80V, Max Input Current=50mA, Mount="Surface Mount", Number of Channels=1, Number of Elements=1, Number of Pins=4, Output Current per Channel=50mA, Packaging="Tape and Reel", Power Dissipation=170mW, Pricing 1="1=0,55000, 10=0,35700, 100=0,23700, 1000=0,17600, 3000=0,17600, 9000=0,17600 (USD)", Radiation Hardening=No, REACH SVHC="No SVHC", Rise Time=18000ns, RoHS=Yes, Stock 1=12141, Supplier 1=Mouser
L1: "WURTH ELEKTRONIK - 744272392 - Filter, Netzfilter, Oberflächenmontage, 2X3900µH, WE-SL5, 9.6 kOhm, 520mA, 10mm x 8.7mm x 6.5mm", Case/Package=SMD/SMT, Current=520mA, DC Resistance (DCR)=540mR, Manufacturer="Wurth Electronics", Max Operating Temperature=125°C, Min Operating Temperature=-40°C, Package Quantity=1, Self Resonant Frequency=100kHz, Supplier Part Number 1=710-744272392, Tolerance=40%, Voltage Rating=80V, Inductance=3.9mH, Category="Common Mode Chokes", Component=3, ComponentLink1Description=https://datasheet.ciiva.com/7764/1735670-7764962.pdf?src-supplier=Element14, ComponentLink1URL=https://datasheet.ciiva.com/7764/1735670-7764962.pdf?src-supplier=Element14, ComponentLink2Description=https://datasheet.ciiva.com/7265/744272392-7265012.pdf?src-supplier=Newark, ComponentLink2URL=https://datasheet.ciiva.com/7265/744272392-7265012.pdf?src-supplier=Newark, ComponentLink3Description=https://datasheet.ciiva.com/6048/1696178-6048502.pdf?src-supplier=Farnell, ComponentLink3URL=https://datasheet.ciiva.com/6048/1696178-6048502.pdf?src-supplier=Farnell, ComponentLink4Description=https://datasheet.ciiva.com/17069/0900766b80596bb6-17069704.pdf?src-supplier=Allied+Electronics, ComponentLink4URL=https://datasheet.ciiva.com/17069/0900766b80596bb6-17069704.pdf?src-supplier=Allied+Electronics, ComponentLink5Description=https://datasheet.ciiva.com/4952/744272392-25143-4952443.pdf?src-supplier=Mouser, ComponentLink5URL=https://datasheet.ciiva.com/4952/744272392-25143-4952443.pdf?src-supplier=Mouser, ComponentLink6Description=https://datasheet.ciiva.com/6216/744272392-6216197.pdf?src-supplier=Digi-Key, ComponentLink6URL=https://datasheet.ciiva.com/6216/744272392-6216197.pdf?src-supplier=Digi-Key, ComponentLink7Description=https://datasheet.ciiva.com/6216/744272392-6216199.pdf?src-supplier=Digi-Key, ComponentLink7URL=https://datasheet.ciiva.com/6216/744272392-6216199.pdf?src-supplier=Digi-Key, ComponentLink8Description=https://datasheet.ciiva.com/26308/744272392-eng-tds-26308748.pdf?src-supplier=Distrelec, ComponentLink8URL=https://datasheet.ciiva.com/26308/744272392-eng-tds-26308748.pdf?src-supplier=Distrelec, Core Material=Ferrite, Current Rating=520mA, Depth=8.7mm, Height=6.5mm, Lead Free="Lead Free", Length=0.394inch, Manufacturer Part Number="LINE FILTER", Max Current Rating=520mA, Max DC Current=520mA, Mount="Surface Mount", Number of Lines=2, Number of Pins=4, Packaging="Tape and Reel", Pricing 1="1=3,14000, 10=2,91000, 25=2,91000, 50=2,63000, 100=2,54000, 250=2,54000 (USD)", REACH SVHC="No SVHC", Resistance=540mR, RoHS=Yes, Stock 1=1253, Supplier 1=Mouser, Termination=SMD/SMT, Test Frequency=100kHz, Voltage Rating (DC)=80V, Weight=0.026103oz, Width=0.343inch, Impedance=9.6kR, Inductance Tolerance=40%
R1 R4 R5: library part "RES 100R 1/4W", "YAGEO         RC0603FR-07100RL            RES, THICK FILM, 100R, 1%, 0.1W, 0603, REEL", Case Code (Metric)=1608, Case Code (Imperial)=0603, Manufacturer=Yageo, Max Operating Temperature=155°C, Min Operating Temperature=-55°C, Power Rating=100mW, Supplier Part Number 1=603-RC0603FR-07100RL, Temperature Coefficient=100ppm/°C, Tolerance=1%, Voltage Rating=50V, Case/Package=0603, Category="Chip SMD Resistors", Component=8, ComponentLink1Description=https://datasheet.ciiva.com/7660/38590-7660788.pdf?src-supplier=Element14, ComponentLink1URL=https://datasheet.ciiva.com/7660/38590-7660788.pdf?src-supplier=Element14, ComponentLink2Description=https://datasheet.ciiva.com/11808/0900766b80f96399-11808280.pdf?src-supplier=RSComponents, ComponentLink2URL=https://datasheet.ciiva.com/11808/0900766b80f96399-11808280.pdf?src-supplier=RSComponents, ComponentLink3Description=https://datasheet.ciiva.com/46440/1868787-46440890.pdf?src-supplier=Element14, ComponentLink3URL=https://datasheet.ciiva.com/46440/1868787-46440890.pdf?src-supplier=Element14, ComponentLink4Description=https://datasheet.ciiva.com/7746/1738695-7746237.pdf?src-supplier=Element14, ComponentLink4URL=https://datasheet.ciiva.com/7746/1738695-7746237.pdf?src-supplier=Element14, ComponentLink5Description=https://datasheet.ciiva.com/7746/1738695-7746238.pdf?src-supplier=Element14, ComponentLink5URL=https://datasheet.ciiva.com/7746/1738695-7746238.pdf?src-supplier=Element14, ComponentLink6Description=https://datasheet.ciiva.com/22747/443971-22747518.pdf?src-supplier=Element14, ComponentLink6URL=https://datasheet.ciiva.com/22747/443971-22747518.pdf?src-supplier=Element14, Composition="Thick Film", Depth=0.8mm, Height=0.45mm, Lead Free="Lead Free", Length=1.6mm, Manufacturer Part Number="RES 100R 1/4W", Military Standard=Not, Number of Pins=2, Packaging="Tape and Reel", Pricing 1="1=0,10000, 10=0,01800, 100=0,00600, 1000=0,00500, 5000=0,00300, 10000=0,00300 (USD)", REACH SVHC=Unknown, Resistance=100R, RoHS=Yes, Stock 1=601037, Supplier 1=Mouser, Termination=SMD/SMT, Voltage Rating (DC)=50V, Width=0.8mm
R2: library part "RES  56K 1/4W", "Resistor,Metal Glaze,56KOhms,200WV,5+/-% Tol,-200,200ppm-TC,1206-Case ;RoHS Compliant: Yes", Case Code (Metric)=3216, Case Code (Imperial)=1206, Manufacturer="Vishay Dale", Max Operating Temperature=155°C, Max Power Dissipation=250mW, Min Operating Temperature=-55°C, Package Quantity=5000, Resistance=56kR, Supplier Part Number 1=71-CRCW1206J-56K-E3, Temperature Coefficient=200ppm/°C, Tolerance=5%, Voltage Rating=200V, Case/Package=1206, Category="Chip SMD Resistors", Component=2, ComponentLink1Description=https://datasheet.ciiva.com/2496/dcrcwe3-2496448.pdf?src-supplier=Digi-Key, ComponentLink1URL=https://datasheet.ciiva.com/2496/dcrcwe3-2496448.pdf?src-supplier=Digi-Key, ComponentLink2Description=https://datasheet.ciiva.com/2496/dcrcwe3-2496449.pdf?src-supplier=Digi-Key, ComponentLink2URL=https://datasheet.ciiva.com/2496/dcrcwe3-2496449.pdf?src-supplier=Digi-Key, ComponentLink3Description=https://datasheet.ciiva.com/2496/dcrcwe3-2496450.pdf?src-supplier=Digi-Key, ComponentLink3URL=https://datasheet.ciiva.com/2496/dcrcwe3-2496450.pdf?src-supplier=Digi-Key, ComponentLink4Description=https://datasheet.ciiva.com/8999/dcrcwe3-8999045.pdf?src-supplier=Avnet, ComponentLink4URL=https://datasheet.ciiva.com/8999/dcrcwe3-8999045.pdf?src-supplier=Avnet, ComponentLink5Description=https://datasheet.ciiva.com/8999/dcrcwe3-8999051.pdf?src-supplier=Avnet, ComponentLink5URL=https://datasheet.ciiva.com/8999/dcrcwe3-8999051.pdf?src-supplier=Avnet, Composition="Thick Film", Contact Plating=Tin, Depth=1.6mm, Features="Automotive AEC-Q200", Height=0.55mm, Height - Seated (Max)=0.024inch, Lead Free="Lead Free", Length=3.2mm, Manufacturer Part Number="RES  56K 1/4W", Military Standard=Not, Number of Pins=2, Number of Terminations=2, Packaging="Tape and Reel", Power Rating=250mW, Pricing 1="1=0,10000, 10=0,07300, 100=0,02900, 1000=0,01200, 5000=0,00800, 10000=0,00700 (USD)", Radiation Hardening=No, REACH SVHC=Unknown, RoHS=Yes, Stock 1=9995, Supplier 1=Mouser, Voltage Rating (DC)=200V, Weight=0.000353oz, Width=0.063inch, Working Voltage=200V